# EAGLE board GankenKunCircuit (EAGLE 6.6.0)
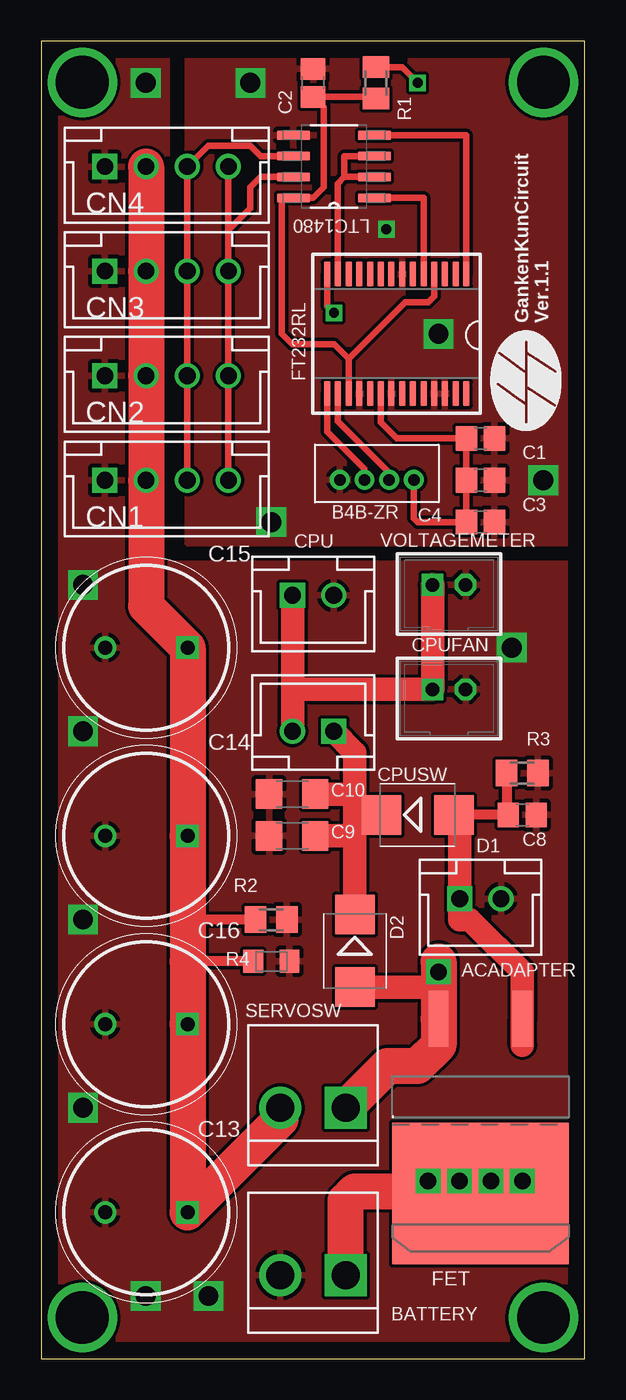
[diagram p0: board, top side]
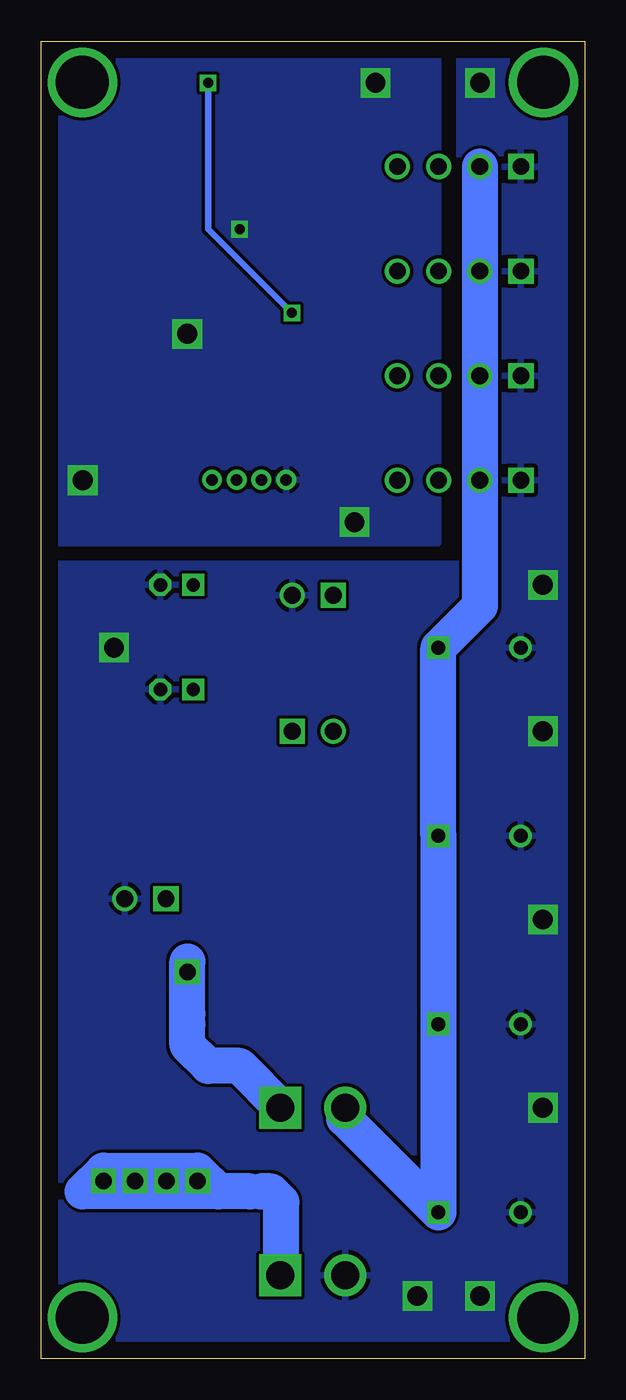
[diagram p1: board, bottom side, seen from below]

Size 33 x 80 mm. Coordinates in mm from the lower left corner, seen from the top.
Outline: 0,0 33,0 33,80 0,80 0,0
Copper layers (1*16): Top 0.035mm / dielectric 1.5mm / Bottom 0.035mm
Design rules "default": minimum track width 10mil, minimum drill 24mil, track to track 8mil, track to pad 8mil, pad to pad 8mil, via to via 8mil, smd to smd 8mil, copper to edge 40mil, drill to drill 8mil, minimum pad ring 10mil, minimum via ring 8mil, stop-mask expansion 4mil, vias tented up to drill 0mil, thermal gap 10mil

## Footprints (pad centres in the part's own frame; a part is rotated, then mirrored left to right if it is on the bottom)
B2B-XH-A = drill 1.016 square: 1 -1.25,0 | drill 1.016: 2 1.25,0
B4B-ZR = drill 0.7: 1 6,-1.3; 2 4.5,-1.3; 3 3,-1.3; 4 1.5,-1.3
B2P-VH = drill 1.7 square: 1 -1.98,0 | drill 1.7: 2 1.98,0
C2012 = smd 1.3 x 1.5: 1 -0.85,0; 2 0.85,0
C3216 = smd 1.6 x 1.8: 1 -1.4,0; 2 1.4,0
CAPPRD500W65D1000H1350 = drill 0.85 pad 1.275 square: 1 0,0 | drill 0.85 pad 1.275: 2 5,0
B4B-XH-A = drill 1.016 square: 1 -3.75,0 | drill 1.016: 2 -1.25,0; 3 1.25,0; 4 3.75,0
B2B-PH-K = drill 0.813 square: 1 -1,0 | drill 0.813 octagon: 2 1,0
SMB = smd 2.4 x 2.4: A 2.2,0; C -2.2,0
TO-263-2 = smd 1.2 x 3.4: 1 -2.54,-9.207; 3 2.54,-9.207 | smd 10.7 x 8.6: 4 0,1.393
SSOP28 = smd 0.381 x 1.499: 1 -4.225,-3.625; 2 -3.575,-3.625; 3 -2.925,-3.625; 4 -2.275,-3.625; 5 -1.625,-3.625; 6 -0.975,-3.625; 7 -0.325,-3.625; 8 0.325,-3.625; 9 0.975,-3.625; 10 1.625,-3.625; 11 2.275,-3.625; 12 2.925,-3.625; 13 3.575,-3.625; 14 4.225,-3.625; 15 4.225,3.625; 16 3.575,3.625; 17 2.925,3.625; 18 2.275,3.625; 19 1.625,3.625; 20 0.975,3.625; 21 0.325,3.625; 22 -0.325,3.625; 23 -0.975,3.625; 24 -1.625,3.625; 25 -2.275,3.625; 26 -2.925,3.625; 27 -3.575,3.625; 28 -4.225,3.625
SOIC127P600X175-8N = smd 1.981 x 0.533: 1 -2.464,1.905; 2 -2.464,0.635; 3 -2.464,-0.635; 4 -2.464,-1.905; 5 2.464,-1.905; 6 2.464,-0.635; 7 2.464,0.635; 8 2.464,1.905
M2012 = smd 1.3 x 1.6: 1 -0.95,0; 2 0.95,0
CT/CN0805 = smd 1.2 x 1.4: 1 -1.1,0; 2 1.1,0

## Placement (x,y rotation side)
ACADAPTER  [B2B-XH-A]  26.67,27.94 0 top
B4B-ZR  B4B-ZR  [B4B-ZR]  24.13,52.07 180 top
BATTERY  [B2P-VH]  16.51,5.08 180 top
C1  0.01u  [C2012]  26.67,55.88 0 top
C2  0.1u  [C2012]  16.51,77.47 90 top
C3  0.1u  [C2012]  26.67,53.34 0 top
C4  4.7u  [C2012]  26.67,50.8 0 top
C8  0.1u  [C2012]  29.21,33.02 0 top
C9  10u  [C3216]  15.24,31.75 180 top
C10  10u  [C3216]  15.24,34.29 180 top
C13  35SEPF120M  [CAPPRD500W65D1000H1350]  8.89,8.89 180 top
C14  35SEPF120M  [CAPPRD500W65D1000H1350]  8.89,31.75 180 top
C15  35SEPF120M  [CAPPRD500W65D1000H1350]  8.89,43.18 180 top
C16  35SEPF120M  [CAPPRD500W65D1000H1350]  8.89,20.32 180 top
CN1  [B4B-XH-A]  7.62,72.39 0 top
CN2  [B4B-XH-A]  7.62,53.34 0 top
CN3  [B4B-XH-A]  7.62,59.69 0 top
CN4  [B4B-XH-A]  7.62,66.04 0 top
CPU  [B2B-XH-A]  16.51,46.35 0 top
CPUFAN  B2B-PH-K  [B2B-PH-K]  24.77,40.64 0 top
CPUSW  [B2B-XH-A]  16.51,38.1 180 top
D1  [SMB]  22.86,33.02 0 top
D2  [SMB]  19.05,24.77 270 top
FET  SUM110P06-07L  [TO-263-2]  26.67,11.43 180 top
FT232RL  FT232RL  [SSOP28]  21.59,62.23 180 top
LTC1480  LTC1480CS8PBF  [SOIC127P600X175-8N]  17.78,72.39 180 top
R1  10k  [M2012]  20.32,77.47 90 top
R2  1k  [M2012]  13.97,26.67 0 top
R3  1k  [M2012]  29.21,35.56 0 top
R4  VARISTORCN0805  [CT/CN0805]  13.97,24.13 0 top
SERVOSW  [B2P-VH]  16.51,15.24 180 top
VOLTAGEMETER  B2B-PH-K  [B2B-PH-K]  24.77,46.99 0 top

## Library data of the parts
ACADAPTER CN1-CN4 CPU CPUSW = jst-xh
B4B-ZR = jst
BATTERY SERVOSW = jst-vh
C1-C4 C8-C10 = rcl
C13-C16 = 35SEPF120M; DESCRIPTION: Panasonic 120uF 35 V dc Polymer Aluminium Capacitor F13, OS-CON Series 5000h 10 x 13mm; HEIGHT: 13.5mm; MANUFACTURER_NAME: Panasonic; MANUFACTURER_PART_NUMBER: 35SEPF120M; MOUSER_PART_NUMBER: 667-35SEPF120M; MOUSER_PRICE-STOCK: https://www.mouser.com/Search/Refine.aspx?Keyword=667-35SEPF120M; RS_PART_NUMBER: 1000082; RS_PRICE-STOCK: http://uk.rs-online.com/web/p/products/1000082
CPUFAN VOLTAGEMETER = jst-ph
D1 D2 = diode
FET = SUM110P06-07L; AVAILABILITY: Unavailable; MF: Vishay; MP: SUM110P06-07L; PACKAGE: None; PRICE: None
FT232RL = FT232RL; AVAILABILITY: Good; DESCRIPTION: USB-to-UART 1-CH 256Byte FIFO 5V 28-Pin SSOP; MF: FTDI; MP: FT232RL; PACKAGE: None; PRICE: 8.94 USD
LTC1480 = LTC1480CS8PBF; AVAILABILITY: Unavailable; DESCRIPTION: RS485 Interface package: SO-8 manufacturer: Linear Technologie; MF: Linear Technology/Analog; MP: LTC1480CS8#PBF; PACKAGE: SO-8 Linear Technology; PRICE: None
R1-R3 = resistor
R4 = varistor

## Nets
AGND: B4B-ZR.1 C1.2 C2.2 C3.2 C4.2 FT232RL.7 FT232RL.18 FT232RL.21 FT232RL.25 FT232RL.26 LTC1480.5
GND: ACADAPTER.2 BATTERY.2 C8.2 C9.2 C10.2 C13.2 C14.2 C15.2 C16.2 CN1.1 CN2.1 CN3.1 CN4.1 CPU.2 CPUFAN.2 R2.2 R3.2 R4.2 VOLTAGEMETER.2
N$1: C2.1 FT232RL.4 FT232RL.17 LTC1480.8 R1.1
N$2: B4B-ZR.4 C1.1 C3.1 C4.1 FT232RL.20
N$3: FT232RL.14 R1.2
N$4: B4B-ZR.3 FT232RL.16
N$5: B4B-ZR.2 FT232RL.15
N$6: CN1.4 CN2.4 CN3.4 CN4.4 LTC1480.7
N$7: FT232RL.1 LTC1480.4
N$8: FT232RL.5 LTC1480.1
N$9: FT232RL.13 LTC1480.2 LTC1480.3
N$10: CN1.3 CN2.3 CN3.3 CN4.3 LTC1480.6
N$12: BATTERY.1 FET.4
N$13: D2.A FET.3 SERVOSW.1
N$15: C9.1 C10.1 CPUSW.1 D1.C D2.C
N$16: ACADAPTER.1 C8.1 D1.A FET.1 R3.1
N$18: CPU.1 CPUFAN.1 CPUSW.2 VOLTAGEMETER.1
VCC: C13.1 C14.1 C15.1 C16.1 CN1.2 CN2.2 CN3.2 CN4.2 R2.1 R4.1 SERVOSW.2

## Tracks (layer width: path | path; a pad name or v marks a point on that pad's centre or on a via)
AGND  (via drill 0.6, 1.2)
  other vias: 12.7,77.47 24.13,62.23 30.48,53.34 13.97,50.8 20.95,68.58
  pour Top: 33.02,80.01 8.89,80.01 8.89,49.53 33.02,49.53
  pour Bottom: 33.02,80.01 8.89,80.01 8.89,49.53 33.02,49.53
GND  (via drill 1.2)
  other vias: 10.16,3.81 6.35,3.81 2.54,15.24 2.54,26.67 2.54,38.1 2.54,46.99 6.35,77.47 28.57,43.18
  pour Top: 0,0 33.02,0 33.02,48.26 7.62,48.26 7.62,80.01 0,80.01
  pour Bottom: 0,0 33.02,0 33.02,48.26 7.62,48.26 7.62,80.01 0,80.01
N$1
  Top 0.406: R1.1 20.32,76.62 C2.1 17.14,75.98 17.14,71.12 16.51,70.48 LTC1480.8 14.61,70.48 14.61,62.23 15.24,61.59 17.78,61.59 18.66,60.71 | FT232RL.17 18.66,60.71 | FT232RL.4 23.86,64.5 23.5,64.14 22.09,64.14 18.66,60.71
N$2
  Top 0.406: FT232RL.20 20.61,56.85 21.59,55.88 C1.1 C3.1 C4.1 22.86,50.8 22.63,51.03 B4B-ZR.4
N$3  (via drill 0.6)
  Top 0.406: FT232RL.14 17.36,63.91 v17.78,63.5 | v22.86,77.47 21.91,78.42 R1.2
  Bottom 0.406: v17.78,63.5 22.86,68.58 v22.86,77.47
N$4
  Top 0.406: FT232RL.16 18.02,56.91 21.13,53.8 B4B-ZR.3
N$5
  Top 0.406: FT232RL.15 17.36,56.3 19.63,54.03 B4B-ZR.2
N$6
  Top 0.406: CN1.4 11.37,68.58 | 11.37,68.58 CN4.4 CN3.4 CN2.4 | LTC1480.7 13.34,71.75 12.7,71.12 12.7,69.85 11.43,68.58 11.37,68.58
N$7
  Top 0.406: FT232RL.1 25.82,74.3 LTC1480.4
N$8
  Top 0.406: FT232RL.5 23.21,70.48 LTC1480.1
N$9
  Top 0.406: LTC1480.3 18.41,73.03 18.41,71.75 | 18.41,71.75 LTC1480.2 | FT232RL.13 18.02,71.36 18.41,71.75
N$10
  Top 0.406: LTC1480.6 13.34,73.03 12.7,73.66 10.14,73.66 CN1.3 CN4.3 CN3.3 CN2.3
N$11  (via drill 0.6)
  other vias: 17.78,63.5
N$12
  Top 2.184: BATTERY.1 18.49,9.6 19.05,10.16 26.55,10.16 FET.4
N$13
  Top 1.422: D2.A 23.84,22.57 24.13,22.86
  Top 2.184: SERVOSW.1 21.03,17.78 22.86,17.78 24.13,19.05 FET.3 24.13,22.86 24.13,24.13
N$15
  Top 1.422: D2.C 19.05,31.75 | 19.05,31.75 19.05,33.02 | 19.05,33.02 19.05,34.29 | 19.05,34.29 19.05,36.81 CPUSW.1 | D1.C 19.05,33.02 | C10.1 19.05,34.29 | C9.1 19.05,31.75
N$16
  Top 0.61: R3.1 28.26,33.12 C8.1 D1.A
  Top 1.016: D1.A 25.42,32.66
  Top 1.422: 29.21,19.05 FET.1 29.21,23.5 26.04,26.67 25.4,26.67 25.42,26.69 ACADAPTER.1 25.42,32.66
N$18
  Top 1.422: CPUSW.2 15.26,40.64 | VOLTAGEMETER.1 CPUFAN.1 15.26,40.64 | CPU.1 15.26,40.64
N$22
  Bottom 2.184: 18.41,15.24 20.95,17.78 22.86,17.78 24.13,19.05 24.13,20.32 24.13,20.95 24.13,24.13
N$23
  Bottom 2.184: 18.41,5.08 18.41,9.53 19.05,10.16 19.68,10.16
N$24
  Bottom 2.184: 20.32,10.16 22.23,10.16 | 22.23,10.16 30.48,10.16 29.21,11.43 23.5,11.43 22.23,10.16
N$25  (via drill 1)
  other vias: 23.5,10.79
N$26  (via drill 1)
  other vias: 25.4,10.79
N$27  (via drill 1)
  other vias: 27.3,10.79
N$28  (via drill 1)
  other vias: 29.21,10.79
N$29  (via drill 1)
  other vias: 24.13,23.5
N$30  (via drill 0.6)
  other vias: 22.86,77.47
N$31  (via drill 3.2)
  other vias: 2.5,2.5
N$32  (via drill 3.2)
  other vias: 30.5,2.5
N$33  (via drill 3.2)
  other vias: 2.5,77.5
N$34  (via drill 3.2)
  other vias: 30.5,77.5
VCC
  Top 0.61: R2.1 8.89,26.67 | R4.1 8.89,24.13
  Top 2.184: CN1.2 CN4.2 CN3.2 CN2.2 6.37,45.7 C15.1 C14.1 8.89,26.67 8.89,24.13 C16.1 C13.1 14.53,14.53 SERVOSW.2
  Bottom 2.184: 6.35,72.39 6.35,45.72 C15.1 C14.1 C13.1 14.61,14.61 14.61,15.24

## Text on the board
tPlace: GankenKunCircuit / Ver.1.1 | /home/satoshi/Downloads/ss_no_alpha.bmp